# Altium PCB 风扇_V1.5.PcbDoc
Units mm, origin at the board's own origin, x right, y up, seen from the top; angles counter-clockwise.
Board outline 21 x 121 mm, 2 copper layers (Top Layer, Bottom Layer); 84 components, 72 nets, 310 pads, 155 vias.
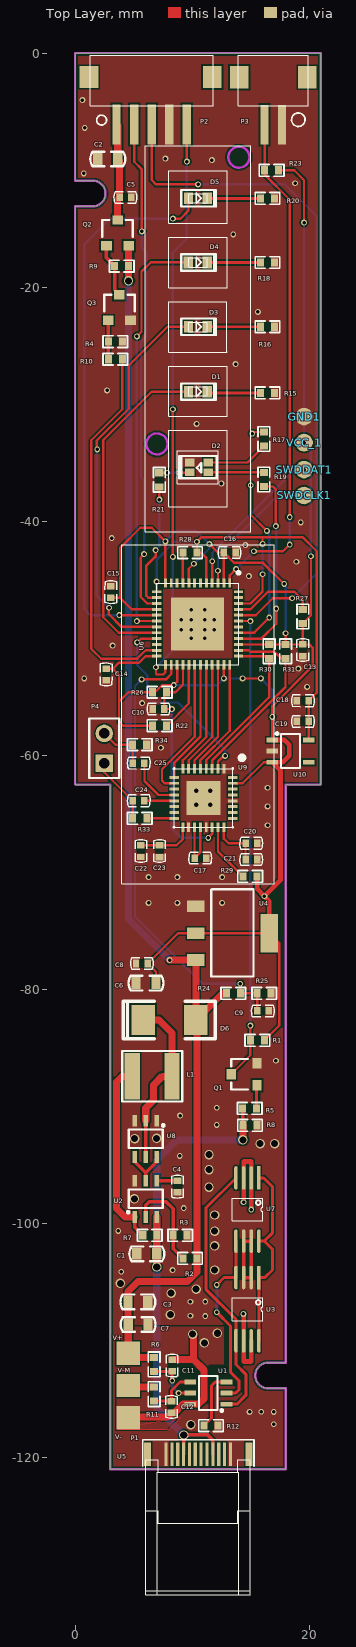
[diagram p0: Top Layer view]
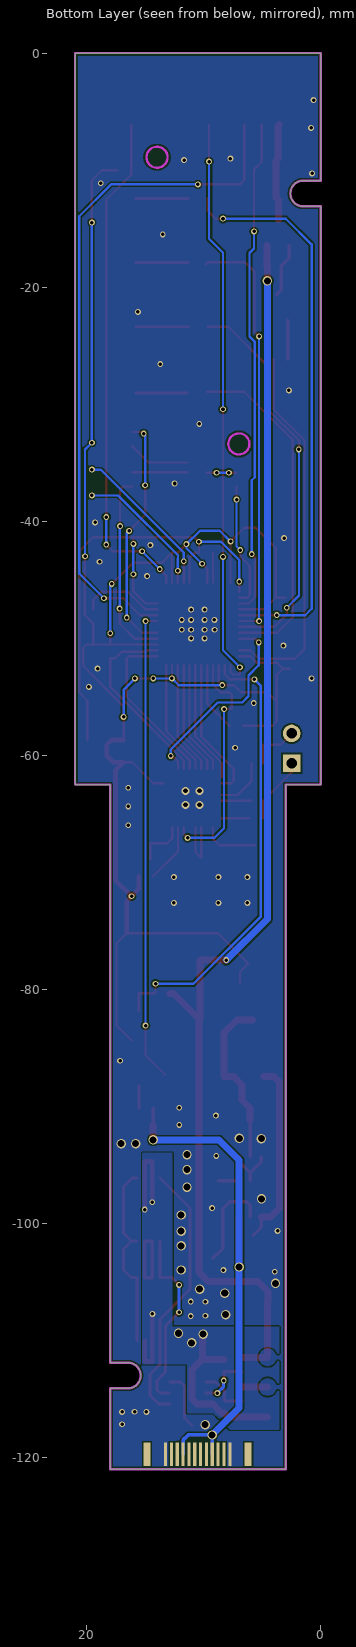
[diagram p1: Bottom Layer view, seen from below]

## Layer stack, top to bottom
Top Layer: signal copper 0.0356
Dielectric: dielectric 0.32, FR-4, Dk 4.8
Bottom Layer: signal copper 0.0356

## Board outline
0,-62.5 0,-13.1 1.5,-13.1 ccw(c1.5,-12) 1.5,-10.9 0,-10.9 0,0 21,0 21,-62.5 18,-62.5 18,-111.9 16.5,-111.9 ccw(c16.5,-113) 16.5,-114.1 18,-114.1 18,-121 3,-121 3,-62.5

## Design rules (kind name [scope] priority, off if disabled: settings)
Clearance [All] p1: gap=0.15
FabricationTestPointUsage TestPointUsage [All] p1: valid=0 allowmultiple=FALSE
FabricationTestpoint Testpoint [(IsPad And (OnTopLayer Or OnBottomLayer))] p1: side=3 testpointundercomponent=TRUE minsize=1.016 maxsize=2.54 preferedsize=1.524 minholesize=0 maxholesize=1.016 preferedholesize=0.813 testpointgrid=0.025 allowsidetop=TRUE allowsidebottom=TRUE usegrid=TRUE gridtolerance=0
PlaneConnect [All] p1: planeconnectstyle=Direct reliefexpansion=0.508 reliefentries=4 reliefconductorwidth=0.254 reliefairgap=0.254
PolygonConnect [All] p1: connectstyle=Direct reliefconductorwidth=0.254 reliefentries=4 polygonreliefangle="90 Angle"
RoutingVias [All] p1: holewidth=0.3 width=0.5 viastyle="Through Hole" minholewidth=0.3 minwidth=0.5 maxholewidth=0.711 maxwidth=1.27
SilkscreenOverComponentPads [All] p1: minsilkscreentomaskgap=0.254
SolderMaskExpansion [All] p1: expansion=0.102
Width [All] p1: maxlimit=1 minlimit=0.15 preferedwidth=0.254
24 further rules are at their usual default settings.

## Components (designator, comment, footprint, x,y, rotation, side; value= is the part's Value field where it differs from the comment)
C1 "47uF" C-0603 6.129,-102.598 r180 top
C2 "22uF" C-0603 2.797,-9.05 r0 top
C3 "47uF" C-0603 5.367,-106.713 r180 top
C4 "4.7uF" C-0402 8.748,-96.853 r270 top
C5 "1uF" C-0402 4.313,-12.334 r180 top
C6 "22uF" C-0603 6.06,-79.468 r0 top
C7 "22uF" C-0603 5.387,-108.646 r180 top
C8 "1uF" C-0402 5.707,-77.792 r0 top
C9 "1uF" C-0402 16.06,-81.849 r180 top
C10 "0.1uF" C-0402 7.119,-56.05 r0 top
C11 "1uF" C-0402 8.293,-112.141 r270 top
C12 "1uF" C-0402 8.242,-115.694 r90 top
C13 "1uF" C-0402 19.459,-51.031 r90 top
C14 "1uF" C-0402 2.659,-53.104 r90 top
C15 "1uF" C-0402 3.051,-46.048 r270 top
C16 "1uF" C-0402 13.216,-42.673 r180 top
C17 "4.7uF" C-0402 10.709,-68.786 r180 top
C18 "1uF" C-0402 19.456,-55.344 r0 top
C19 "10uF" C-0402 19.456,-57.108 r0 top
C20 "10uF" C-0402 15.07,-67.516 r180 top
C21 "0.1uF" C-0402 15.07,-68.908 r180 top
C22 "0.1uF" C-0402 5.629,-68.194 r90 top
C23 "10uF" C-0402 7.219,-68.199 r90 top
C24 "1uF" C-0402 5.428,-63.894 r0 top
C25 "1uF" C-0402 5.428,-60.678 r0 top
D1 "LED0" LED-0603 11.857,-29.611 r180 top
D2 "RGB-GND" 0603*2-LED 9.794,-35.834 r0 top
D3 "LED0" LED-0603 11.857,-24.066 r180 top
D4 "LED0" LED-0603 11.854,-18.567 r180 top
D5 "LED0" LED-0603 11.857,-13.084 r180 top
D6 "SS34" DSMD 10.328,-82.619 r180 top
GND1 "TP" TP-1.5 19.566,-31.062 r90 top
L1 "10uH" L-SMD 6.584,-87.417 r180 top
P1 "Header 3H" 3P-SMT-3*3 4.544,-111.115 r270 top
P2 "TU1501WNR-5PS-VOID-C0-NL-A" TU1501WNR-5PS-VOID-*-NL-A 1.3,-4.483 r0 top
P3 "TU1501WNR-2PS-VOID-C0-NL-A" TU1501WNR-2PS-VOID-*-NL-A 19.939,-4.501 r180 top
P4 "MIC" HDR1X2 2.494,-60.673 r90 top
Q1 "8050" SOT-23 13.343,-87.262 r90 top
Q2 "BM2301" SOT-23 3.635,-14.262 r0 top
Q3 "8050" SOT-23 3.787,-20.637 r0 top
R1 "10K" R-0402 15.448,-84.361 r0 top
R2 "60K" R-0402 9.954,-102.997 r180 top
R3 "10K" R-0402 8.857,-101.023 r0 top
R4 "10K" R-0402 3.564,-24.651 r180 top
R5 "1K" R-0402 14.793,-90.175 r0 top
R6 "330R" R-0402 6.756,-112.177 r90 top
R7 "60mR" R-0402 6.256,-101.021 r0 top
R8 "10K" R-0402 14.816,-91.62 r0 top
R9 "470K" R-0402 3.856,-18.199 r0 top
R10 "4.7K" R-0402 3.564,-26.162 r180 top
R11 "330R" R-0402 6.756,-114.717 r90 top
R12 "2K" R-0402 11.735,-117.279 r180 top
R15 "500R" R-0402 16.309,-29.042 r0 top
R16 "500R" R-0402 16.309,-23.386 r0 top
R17 "500R" R-0402 16.142,-32.855 r270 top
R18 "500R" R-0402 16.309,-17.897 r0 top
R19 "500R" R-0402 16.142,-36.558 r90 top
R20 "500R" R-0402 16.309,-12.418 r0 top
R21 "500R" R-0402 7.201,-36.589 r90 top
R22 "47K" R-0402 7.352,-57.473 r180 top
R23 "47K" R-0402 16.67,-10.02 r0 top
R24 "2M" R-0402 13.396,-80.343 r0 top
R25 "1M" R-0402 16.033,-80.343 r0 top
R26 "47K" R-0402 7.352,-54.615 r180 top
R27 "47K" R-0402 19.459,-48.011 r270 top
R28 "NC/0R" R-0402 9.942,-42.685 r180 top
R29 "47K" R-0402 15.083,-70.358 r180 top
R30 "4.7K" R-0402 16.581,-51.242 r90 top
R31 "4.7K" R-0402 17.988,-51.244 r90 top
R33 "2.2K" R-0402 5.4,-65.39 r0 top
R34 "2.2K" R-0402 5.397,-59.096 r0 top
SWDCLK1 "TP" TP-1.5 19.566,-37.803 r90 top
SWDDAT1 "TP" TP-1.5 19.566,-35.59 r90 top
U1 "HY2120-CB" SOT-23-6L 11.384,-114.498 r90 top
U2 "HM4033" SOT-23-6L 6.04,-97.902 r0 top
U3 "8205A" TSSOP8 15.7,-104.637 r270 top
U4 "AMS1117-3.3V" SOT-223 13.447,-75.204 r270 top
U5 "USB Type-C" "USB-type C" 10.523,-119.72 r0 top
U6 "SNC73280M4" QFN48-7*7 -0.033,-49.533 r270 top
U7 "8205A" TSSOP8 15.7,-96.118 r270 top
U8 "HM8205-6" SOT-23-6L 6.04,-92.776 r180 top
U9 "SNAUD01" QFN32_AUDO01 10.96,-63.642 r270 top
U10 "ACE50912BN+" SOT-23-5 18.405,-59.644 r270 top
VCC_1 "TP" TP-1.5 19.566,-33.292 r90 top

## Footprints (in the part's own frame and the unit in brackets; to place one, negate y for a bottom-side part, rotate by r counter-clockwise, add the part's x,y. Pads: shape width x height; smd on the part's side, far side on the other; paste and mask are expansions set on the pad)
3P-SMT-3*3 [mm]
  rect 2x2 smd: 1(0,0) 2(2.74,0) 3(5.48,0)
0603*2-LED [mm]
  rect 0.8x0.65 smd: 1(1.6,0.85) 2(1.6,0) 3(0,0) 4(0,0.85)
  silkscreen extent -0.9,-0.5 2.3,1.4
C-0402 [mm]
  rect 0.55x0.65 smd: 1(-0.5,0) 2(0.5,0)
  Top Layer pour cut-out: -0.228,0.419 -0.228,-0.419 0.229,-0.419 0.216,-0.406 0.216,0.419
  silkscreen extent -0.96,-0.5 0.99,0.5
C-0603 [mm]
  rect 0.8x1 smd: 1(-0.85,0) 2(0.85,0)
  silkscreen extent -1.49,-0.63 1.49,0.63
DSMD [mm]
  rect 2x2.54 smd: 1(0,0) 3(4.5,0)
  silkscreen extent -1.65,-1.6 6.22,1.6
HDR1X2 [mm] "Connector; Header; 2 Position"
  rect 1.5x1.5 hole 0.9: 1(0,0)
  round 1.5 hole 0.9: 2(2.54,0)
  silkscreen extent -1.27,-1.27 3.81,1.27
L-SMD [mm]
  rect 1.3x4 smd: 1(1.692,0.016) 2(-1.708,0.016)
  silkscreen extent -2.57,-2.14 2.56,2.17
LED-0603 [mm]
  rect 0.8x1 smd: 1(2.17,-0.68) 2(0.57,-0.68)
  silkscreen extent -0.19,-1.38 2.77,0.02
QFN32_AUDO01 [mm] "QFN, 32-Leads, Body 5.0x5.0mm (max), Pitch 0.50mm, IPC Medium Density"
  rect 0.8x0.25 smd: 1(-2.5,1.75) 2(-2.5,1.25) 3(-2.5,0.75) 4(-2.5,0.25) 5(-2.5,-0.25) 6(-2.5,-0.75) 7(-2.5,-1.25) 8(-2.5,-1.75) 17(2.5,-1.75) 18(2.5,-1.25) 19(2.5,-0.75) 20(2.5,-0.25) 21(2.5,0.25) 22(2.5,0.75) 23(2.5,1.25) 24(2.5,1.75)
  rect 0.25x0.8 smd: 9(-1.75,-2.5) 10(-1.25,-2.5) 11(-0.75,-2.5) 12(-0.25,-2.5) 13(0.25,-2.5) 14(0.75,-2.5) 15(1.25,-2.5) 16(1.75,-2.5) 25(1.75,2.5) 26(1.25,2.5) 27(0.75,2.5) 28(0.25,2.5) 29(-0.25,2.5) 30(-0.75,2.5) 31(-1.25,2.5) 32(-1.75,2.5)
  rect 2.9x2.9 smd: 33(0,0)
  silkscreen extent -3.67,-2.52 2.52,3.55
QFN48-7*7 [mm]
  rect 0.8x0.25 smd: 1(-4.25,13.25) 2(-4.25,12.75) 3(-4.25,12.25) 4(-4.25,11.75) 5(-4.25,11.25) 6(-4.25,10.75) 7(-4.25,10.25) 8(-4.25,9.75) 9(-4.25,9.25) 10(-4.25,8.75) 11(-4.25,8.25) 12(-4.25,7.75) 25(2.75,7.75) 26(2.75,8.25) 27(2.75,8.75) 28(2.75,9.25) 29(2.75,9.75) 30(2.75,10.25) 31(2.75,10.75) 32(2.75,11.25) 33(2.75,11.75) 34(2.75,12.25) 35(2.75,12.75) 36(2.75,13.25)
  rect 0.25x0.8 smd: 13(-3.5,7) 14(-3,7) 15(-2.5,7) 16(-2,7) 17(-1.5,7) 18(-1,7) 19(-0.5,7) 20(0,7) 21(0.5,7) 22(1,7) 23(1.5,7) 24(2,7) 37(2,14) 38(1.5,14) 39(1,14) 40(0.5,14) 41(0,14) 42(-0.5,14) 43(-1,14) 44(-1.5,14) 45(-2,14) 46(-2.5,14) 47(-3,14) 48(-3.5,14)
  rect 4.5x4.5 smd: 49(-0.75,10.5)
  silkscreen extent -5.25,7 2.75,14.13
R-0402 [mm]
  rect 0.6x0.7 smd: 1(-0.473,0) 2(0.727,0)
  Top Layer pour cut-out: -0.178,0.445 -0.178,-0.445 0.432,-0.445 0.432,0.445
  silkscreen extent -0.92,-0.5 1.18,0.5
SOT-23 [mm]
  rect 0.9x0.8 smd: 1(-0.95,-2.2) 2(0.95,-2.2) 3(0,0)
  silkscreen extent -1.3,-1.44 1.3,0
SOT-23-5 [mm]
  rect 0.4x1 smd: 1(-0.95,-1.55) 2(0,-1.55) 3(0.95,-1.55) 4(0.95,1.55) 5(-0.95,1.55)
  silkscreen extent -1.6,-1.24 1.45,0.8
SOT-23-6L [mm]
  rect 0.4x1 smd: 1(-0.95,-1.55) 2(0,-1.55) 3(0.95,-1.55) 4(0.95,1.55) 5(0,1.55) 6(-0.95,1.55)
  silkscreen extent -1.6,-1.24 1.45,0.8
SOT-223 [mm]
  rect 1x1.5 smd: 1(-2.3,-3.15) 2(0,-3.15) 3(2.3,-3.15)
  rect 3.3x1.5 smd: ""(0,3.15)
  silkscreen extent -3.76,-1.8 3.7,1.8
TP-1.5 [mm]
  round 1.5 smd: 1(0,0)
TSSOP8 [mm]
  rect 2x0.3 smd: 1(0,0)
  oval 2x0.3 smd: 2(0,-0.65) 3(0,-1.3) 4(0,-1.95) 5(5.4,-1.95) 6(5.4,-1.3) 7(5.4,-0.65) 8(5.4,0)
  silkscreen extent 1.74,-2.28 3.66,0.33
TU1501WNR-2PS-VOID-*-NL-A [mm]
  rect 0.7x3.4 smd: 1(2.25,1.62) 2(3.75,1.62)
  rect 1.6x1.9 smd: 3(0.11,-2.438) 4(5.9,-2.438)
  silkscreen extent 0,-4.32 6,1.77
TU1501WNR-5PS-VOID-*-NL-A [mm]
  rect 0.7x3.4 smd: 1(2.25,-1.62) 2(3.75,-1.62) 3(5.25,-1.62) 4(6.75,-1.62) 5(8.25,-1.62)
  rect 1.6x1.9 smd: 6(-0.11,2.438) 7(10.43,2.438)
  silkscreen extent 0,-1.66 10.5,4.3
"USB-type C" [mm]
  rect 0.27x2 smd: 1(-2.75,0) 2(-2.25,0) 3(-1.75,0) 4(-1.25,0) 5(-0.75,0) 6(-0.25,0) 7(0.25,0) 8(0.75,0) 9(1.25,0) 10(1.75,0) 11(2.25,0) 12(2.75,0)
  rect 0.27x2 smd far side: 13(2.75,0) 14(2.25,0) 15(1.75,0) 16(1.25,0) 17(0.75,0) 18(0.25,0) 19(-0.25,0) 20(-0.75,0) 21(-1.25,0) 22(-1.75,0) 23(-2.25,0) 24(-2.75,0)
  rect 0.6x2 smd: ""(-4.32,0) ""(4.32,0)
  rect 0.6x2 smd far side: ""(-4.32,0) ""(4.32,0)
  silkscreen extent -4.73,-1.03 4.76,1.22

## Part data
C1 C2 C3 C4 C5 C6 C7 C8 C9 C10 C11 C12 C13 C14 C15 C16 C17 C18 C19 C20 C21 C22 C23 C24 C25: library part Cap, "Capacitor"
D1 D3 D4 D5: "Typical INFRARED GaAs LED"
D6: library part "Diode 10TQ035", "Schottky Rectifier"
L1: library part Inductor, "Inductor"
P1: "Header, 3-Pin, Right Angle"
P4: library part "Header 2", "Header, 2-Pin"
Q1 Q3: library part NPN, "NPN Bipolar Transistor"
Q2: library part PMOS-2, "P-Channel Power MOSFET"
R1 R2 R3 R4 R5 R6 R7 R8 R9 R10 R11 R12 R15 R16 R17 R18 R19 R20 R21 R22 R23 R24 R25 R26 R27 R28 R29 R30 R31 R33 R34: library part Res1, "Resistor"
U1: library part HY2120
U4: library part AMS1117

## Via types
v1: diameter 0.5, hole 0.3, Top Layer to Bottom Layer, tented both sides, 127 vias
v2: diameter 0.8, hole 0.6, Top Layer to Bottom Layer, tented both sides, 24 vias
v3: diameter 0.7, hole 0.4, Top Layer to Bottom Layer, tented both sides, 4 vias

## Nets (pads, with @x,y where several pads share a name; then routed paths per layer and width w, separated by ;. In a path a pad name is that pad's centre, name@x,y a point inside that pad or via, vN(x,y) a via of type N, cw(c..) or ccw(c..) an arc to the next point about the centre after c; other vN are vias at no path point)
5V: C1.1 R5.1 R7.2 R8.1 U2.3 U5.4 U5.9 U5.16 U5.21 | length 50.7
  Top Layer w0.3: U5.4 U5.4@9.273,-119.707 ; U5.4@9.286,-119.707 v2(9.286,-118.08) 11.34,-118.08 11.773,-118.514 U5.9 ; R8.1@14.32,-91.597 R5.1
  Top Layer w0.6: v2(6.98,-103.73) U2.3@6.98,-99.462 ; v2(14.33,-92.87) R8.1@14.33,-91.608
  Bottom Layer w0.3: U5.21 v2@9.273,-118.093 ; v2(9.286,-118.08) 11.34,-118.08 11.773,-118.514 U5.16
  Bottom Layer w0.6: v2(9.286,-118.08) 6.98,-115.774 v2(6.98,-103.73) 6.98,-94.58 8.69,-92.87 v2(14.33,-92.87) v2@14.13,-92.87
BAT: C3.2 C7.2 D6.1 P1.1 Q2.2 R2.1 R6.2 R9.2 R24.1 U4.3 | length 109.3
  Top Layer w0.6: C3.2 4.517,-105.823 5.38,-104.96 9.62,-104.96 10.427,-104.153 R2.1 10.427,-82.718 D6.1 ; C7.2 C3.2@4.537,-106.733 ; C7.2@4.544,-108.653 4.544,-111.45 R6.2 ; v2(4.57,-19.46) R9.2@4.57,-18.212 ; R9.2 Q2.2@4.583,-16.464 ; v1(8.08,-77.51) 8.086,-77.504 U4.3 ; U4.3@10.328,-77.535 D6.1 ; R24.1 12.603,-80.343 D6.1
  Bottom Layer w0.6: v2(4.57,-19.46) 4.57,-74 v1(8.08,-77.51)
BAT-: C11.1 C12.1 P1.3 U1.6 U3.6 U3.7 U7.2 U7.3 | length 30.8
  Top Layer w0.4: v1@14.4,-107.75 U3.6 14.4,-111.81 15.05,-111.81 U3.7 15.05,-111.3 ; v1(14.4,-98.19) U7.3 14.4,-94.71 15.05,-94.71 U7.2 v1(15.05,-98.82)
  Top Layer w0.6: P1.3@4.544,-116.53 7.906,-116.53 C12.1 8.479,-116.194 9.225,-115.448 U1.6 10.562,-115.448 11,-115.01 11,-112.51 10.131,-111.641 C11.1 ; 10.11,-111.68 v2@10.11,-109.49
  other v1: 14.39,-107.74
  other v2: 11.04,-110.21 10.05,-109.46 12.16,-109.39
BAT_ADC: C9.2 R24.2 R25.1 U6.26 | length 39.1
  Top Layer w0.2: v1(5.68,-53.52) 7.76,-53.52 8.218,-53.062 U6.26 ; v1(14.12,-79.53) 14.123,-79.533 R24.2 R25.1 C9.2
  Bottom Layer w0.2: v1(5.68,-53.52) 5.12,-54.08 5.12,-73.772 10.878,-79.53 v1(14.12,-79.53)
BIAS: R33.2 U9.16 | length 2.3
  Top Layer w0.2: R33.2 U9.16@8.458,-65.39
D6_1: D6.3 L1.2 U8.2 U8.5 | length 14.9
  Top Layer w0.3: U8.5 U8.2
  Top Layer w0.6: D6.3 7.179,-82.619 8.292,-83.732 L1.2 7.453,-87.433 6.72,-88.165 6.72,-89.47 6.04,-90.15 U8.2
DRV: U2.5 U8.4 U8.6 | length 4.2
  Top Layer w0.3: U8.4 5.09,-94.72 6.04,-95.67 ; U2.5 6.04,-95.67 ; U8.6 6.99,-94.72 6.04,-95.67
FB: R2.2 R3.1 U2.2 | length 8.3
  Top Layer w0.3: U2.2 6.04,-98.45 6.35,-98.14 7.77,-98.14 8.384,-98.754 8.384,-102.154 R2.2
GND: C1.2 C2.1 C3.1 C4.2 C5.1 C6.1 C7.1 C8.1 C9.1 C10.1 C13.1 C14.1 C15.1 C16.1 C17.1 C18.1 C19.1 C20.1 C21.1 C22.1 C23.1 D2.4 GND1.1 P2.4 P3.1 Q1.2 Q3.2 R3.2 R4.1 R8.2 R12.1 R15.2 R16.2 R18.2 R20.2 R25.2 R34.2 U2.6 U3.2 U3.3 U4.1 U5.1 U5.12 U5.13 U5.24 U6.49 U7.6 U7.7 U8.1 U8.3 U9.1 U9.18 U9.21 U9.28 U9.33 U10.2 | length 7.5
  Top Layer w0.3: U3.3 U7.6 U7.7 15.05,-103.09 U3.2 U3.3
  other v1: 16.98,-117.17 14.91,-116.11 15.91,-116.1 16.98,-116.11 11.12,-107.92 9.86,-107.89 9.86,-106.7 11.12,-106.69 3.94,-104.14 8.33,-104 3.69,-100.65 9.29,-98.7 8.94,-94.24 12.1,-91.59 8.97,-90.79 12.1,-90.12 17.16,-86.1 6.28,-72.62 8.75,-72.62 12.56,-72.62 6.28,-70.41 8.75,-70.41 12.56,-70.41 16.45,-65.98 16.45,-64.37 16.45,-62.78 7.33,-59.36 5.73,-55.55 19.82,-54.16 0.79,-53.44 19.08,-52.6 3.2,-50.63 9.94,-50.02 11.08,-50.02 9.08,-49.28 9.94,-49.28 11.08,-49.28 11.88,-49.28 9.09,-48.43 9.94,-48.43 11.08,-48.43 11.88,-48.43 9.94,-47.56 11.08,-47.55 14.85,-44.69 18.91,-43.46 14.56,-42.04 3.14,-41.44 19.29,-40.1 12.5,-36.78 10.39,-31.69 2.73,-28.83 13.72,-26.58 15.63,-22.12 13.51,-15.49 18.8,-11.12 0.74,-10.28 11.69,-9.14 7.72,-9.02 0.83,-6.4 0.62,-4.02
  other v2: 9.89,-117.2 8.14,-107.8 8.21,-105.96 10.35,-105.62 3.87,-105.12 11.93,-103.99 11.93,-101.92 11.93,-100.67 11.93,-99.29 5.07,-97.91 11.44,-96.91 11.44,-95.41 11.44,-94.13 15.82,-93.19 17.06,-93.19 5.09,-92.76 6.97,-92.74
  other v3: 10.36,-64.242 11.56,-64.242 10.36,-63.042 11.56,-63.042
IP-: C2.2 C5.2 P2.1 Q2.3 | length 8.3
  Top Layer w0.6: P2.1 3.647,-6.199 C2.2 3.812,-9.216 C5.2 3.635,-12.512 Q2.3
KEY_TOP: P3.2 R23.1 U6.1 | length 43.6
  Top Layer w0.2: U6.1@13.218,-45.283 13.218,-44.632 v1(13.76,-44.09) ; v1(15.28,-42.57) 17.77,-42.57 v1(18.34,-42) ; P3.2 16.197,-6.129 R23.1 16.197,-10.387 18.34,-12.53 v1(18.34,-39.65)
  Bottom Layer w0.2: v1(13.76,-44.09) v1(15.28,-42.57) ; v1(18.34,-42) v1(18.34,-39.65)
LED1: D1.1 U6.20 | length 29.3
  Top Layer w0.2: U6.20@6.968,-49.533 3.733,-49.533 2.4,-48.2 2.4,-33.07 6.539,-28.931 D1.1 D1.1@9.711,-28.931
LED2: D3.1 U6.19 | length 33.8
  Top Layer w0.2: v1(1.89,-33.86) 1.857,-33.827 1.857,-33.117 4.587,-30.388 4.587,-26.703 7.904,-23.386 D3.1 ; v1(2.91,-47.4) 2.89,-47.42 2.89,-47.95 3.973,-49.033 U6.19@6.968,-49.033
  Bottom Layer w0.2: v1(1.89,-33.86) 1.86,-33.89 1.86,-46.35 v1(2.91,-47.4)
LED3: D4.1 U6.18 | length 36.3
  Top Layer w0.2: v1(5.283,-48.533) U6.18@6.968,-48.533 ; v1(5.283,-24.207) 5.68,-23.81 5.68,-18.67 6.463,-17.887 D4.1 D4.1@9.86,-18.063
  Bottom Layer w0.2: v1(5.283,-48.533) v1(5.283,-24.207)
LED4: D5.1 U6.17 | length 48.7
  Top Layer w0.2: v1(3.77,-48.03) 3.773,-48.033 U6.17@6.968,-48.033 ; v1(8.36,-14.15) 9,-14.15 9.687,-13.463 D5.1
  Bottom Layer w0.2: v1(3.77,-48.03) 1.33,-48.03 0.79,-47.49 0.79,-16.35 2.99,-14.15 v1(8.36,-14.15)
LED_B: R17.1 U6.41 | length 20.5
  Top Layer w0.2: U6.41@13.968,-49.533 15.297,-49.533 v1(16.59,-48.24) ; v1(15.01,-36.93) 15.01,-39.45 v1(16.39,-40.83) ; v1@15.273,-32.382 R17.1
  Bottom Layer w0.2: v1(15.01,-36.93) 15.01,-32.644 v1(15.137,-32.517) ; v1(16.39,-40.83) 16.59,-41.03 v1(16.59,-48.24)
LED_G: R19.1 U6.40 | length 16.4
  Top Layer w0.2: U6.40@13.968,-50.033 15.927,-50.033 17.19,-48.77 v1(17.19,-47.47) ; R19.1@16.16,-37.05 R19.1 16.901,-37.031 17.16,-37.29 v1(17.16,-40.42)
  Bottom Layer w0.2: v1(17.16,-40.42) 17.19,-40.45 v1(17.19,-47.47)
LED_R: R21.1 U6.14 | length 10.7
  Top Layer w0.2: v1(6.88,-42.47) 6.88,-43.03 6.07,-43.84 6.07,-46.35 6.253,-46.533 U6.14@6.968,-46.533 ; v1(7.2,-38.15) R21.1@7.2,-37.063
  Bottom Layer w0.2: v1(6.88,-42.47) 7.2,-42.15 v1(7.2,-38.15)
M_CW: P2.3 U6.44 | length 58.8
  Top Layer w0.2: P2.3 6.55,-10.85 6.92,-11.22 v1(10.51,-11.22) ; U6.44@13.968,-48.033 15.447,-48.033 16.89,-46.59 v1(18.54,-46.59)
  Bottom Layer w0.2: v1(10.51,-11.22) 17.92,-11.22 20.65,-13.95 20.65,-44.48 v1(18.54,-46.59)
M_FG: P2.2 U6.15 | length 42.8
  Top Layer w0.2: P2.2 5.05,-9.28 5.71,-9.94 v1(5.71,-15.24) ; v1(5.9,-42.81) 5.61,-43.1 5.61,-46.476 6.167,-47.033 U6.15@6.968,-47.033
  Bottom Layer w0.2: v1(5.71,-15.24) 5.71,-16.69 6.1,-17.08 6.1,-24.23 5.633,-24.697 5.633,-36.243 5.9,-36.51 v1(5.9,-42.81)
M_GND: P1.2 R11.2 | length 2.2
  Top Layer w0.6: P1.2@4.544,-113.99 R11.2@6.756,-113.99
M_PWM: P2.5 U6.25 | length 49.6
  Top Layer w0.2: v1(6.91,-52.48) 6.91,-53.02 6.99,-53.1 7.52,-53.1 7.718,-52.902 U6.25 ; v1(8.36,-43.05) v1(8.36,-30.44) ; v1(9.55,-9.27) P2.5
  Bottom Layer w0.2: v1(6.91,-52.48) 8.36,-51.03 v1(8.36,-43.05) ; v1(8.36,-30.44) 8.36,-17.06 9.55,-15.87 v1(9.55,-9.27)
MCLK: U6.21 U9.2 | length 17.3
  Top Layer w0.2: v1(5.3,-50.36) 5.627,-50.033 U6.21@6.968,-50.033 ; U9.2 12.21,-60.53 12.68,-60.06 v1(12.82,-60.06)
  Bottom Layer w0.2: v1(5.3,-50.36) 5.3,-52.3 6.18,-53.18 6.18,-54.95 6.72,-55.49 8.8,-55.49 12.82,-59.51 v1(12.82,-60.06)
MICN_L: C25.2 U9.12 | length 4.5
  Top Layer w0.2: C25.2 5.928,-62.198 7.122,-63.392 U9.12
MICN_R: U9.15
MICP_L: C24.2 U9.13 | length 2.5
  Top Layer w0.2: C24.2 U9.13@8.459,-63.894
MICP_R: U9.14
NetC4_1: C4.1 U2.4 | length 1.8
  Top Layer w0.3: U2.4 C4.1@8.746,-96.352
NetC11_2: C11.2 R6.1 U1.5 | length 4.6
  Top Layer w0.254: R6.1 8.284,-112.65 8.284,-113.414 v1(8.3,-113.43) ; v1(8.842,-114.498) U1.5
  Bottom Layer w0.254: v1(8.3,-113.43) 8.3,-113.956 v1(8.842,-114.498)
NetC12_2: C12.2 R11.1 U1.4 | length 4.3
  Top Layer w0.254: R11.1 8.238,-115.19 8.238,-114.272 8.962,-113.548 U1.4
NetC17_2: C17.2 U9.19 U9.20 | length 5.5
  Top Layer w0.2: 10.208,-67.869 C17.2 10.71,-68.284 U9.20 ; 10.211,-67.866 U9.19@10.211,-66.143
NetC24_1: C24.1 P4.1 R33.1 | length 5.7
  Top Layer w0.2: P4.1 2.494,-61.46 C24.1 4.927,-63.895 R33.1
NetC25_1: C25.1 P4.2 R34.1 | length 4.4
  Top Layer w0.2: P4.2 3.457,-59.096 R34.1 4.928,-59.1 C25.1
NetD1_2: D1.2 R15.1 | length 4.4
  Top Layer w0.254: D1.2@11.398,-29.042 R15.1
NetD2_1: D2.1 R17.2 | length 5.3
  Top Layer w0.2: D2.1 14.739,-34.984 R17.2
NetD2_2: D2.2 R19.2 | length 4.7
  Top Layer w0.2: D2.2 11.397,-35.831 R19.2
NetD2_3: D2.3 R21.2 | length 2.6
  Top Layer w0.2: R21.2 7.858,-35.862 v1(7.86,-35.86) ; v1(8.91,-35.86) D2.3@9.769,-35.86
  Bottom Layer w0.2: v1(7.86,-35.86) v1(8.91,-35.86)
NetD3_2: D3.2 R16.1 | length 4.5
  Top Layer w0.2: D3.2 R16.1
NetD4_2: D4.2 R18.1 | length 4.5
  Top Layer w0.254: D4.2@11.294,-17.897 R18.1
NetD5_2: D5.2 R20.1 | length 4.5
  Top Layer w0.254: D5.2@11.301,-12.418 R20.1
NetL1_1: L1.1 R7.1 U2.1 | length 16
  Top Layer w0.3: U2.1 5.09,-100.328 R7.1
  Top Layer w0.6: L1.1 4.05,-87.433 3.55,-87.933 3.55,-98.724 4.278,-99.452 U2.1
NetQ1_1: Q1.1 R5.2 | length 1.9
  Top Layer w0.254: R5.2 Q1.1@15.52,-88.234
NetQ2_1: Q2.1 Q3.3 R9.1 | length 4.6
  Top Layer w0.3: Q2.1 2.685,-17.501 R9.1 3.383,-20.233 Q3.3
NetQ3_1: Q3.1 R4.2 R10.2 | length 3.3
  Top Layer w0.3: R10.2 Q3.1
NetR12_2: R12.2 U1.3 | length 5.1
  Top Layer w0.254: R12.2 11.65,-116.637 11.65,-113.88 11.982,-113.548 U1.3
NetR27_1: R27.1 U6.45 | length 7.2
  Top Layer w0.2: U6.45@13.968,-47.533 14.987,-47.533 16.49,-46.03 18.75,-46.03 19.459,-46.739 R27.1
NetU3_1: U3.1 U3.8 U7.1 U7.8 | length 16.5
  Top Layer w0.254: U3.8 U3.1 16.213,-104.637 16.86,-103.99 16.86,-102.21 16.168,-101.518 ; U7.8 16.168,-101.518 ; U7.1 16.118,-96.118 16.85,-96.85 16.85,-100.835 16.168,-101.518
OC: U1.2 U3.4 U7.5 | length 15.9
  Top Layer w0.254: v1(12.11,-107.6) 13.29,-108.78 13.29,-112.72 13.99,-113.42 13.99,-114.23 13.722,-114.498 U1.2 ; v1(12.11,-105.26) 12.733,-104.637 U3.4 U7.5
  Bottom Layer w0.254: v1(12.11,-107.6) v1(12.11,-105.26)
OD: U1.1 U3.5 U7.4 | length 23
  Top Layer w0.254: U1.1 13.832,-115.448 14.59,-114.69 14.59,-112.9 13.75,-112.06 U3.5 13.75,-108.2 11.173,-105.623 11.173,-98.695 U7.4
P4_6: SWDCLK1.1 U6.3 | length 11.9
  Top Layer w0.2: v1(12.21,-44.23) 12.218,-44.238 U6.3@12.218,-45.283
  Bottom Layer w0.2: v1@12.22,-44.23 v1(12.21,-44.23) 12.218,-44.222 12.218,-43.207 12.21,-43.198 12.21,-42.913 17.32,-37.803 v1(19.566,-37.803)
P4_7: SWDDAT1.1 U6.4 | length 13.4
  Top Layer w0.2: U6.4 11.71,-45.275 11.71,-43.43 v1(11.718,-43.422)
  Bottom Layer w0.2: v1(11.718,-43.422) 11.718,-42.672 18.8,-35.59 v1(19.566,-35.59)
PLL_OUT: U9.11
RST: C10.2 R26.1 U6.28 U9.22 | length 20.2
  Top Layer w0.2: v1(8.27,-56.05) C10.2 7.619,-54.821 7.83,-54.611 8.571,-54.611 9.218,-53.964 U6.28@9.218,-52.283 ; v1(11.38,-67.06) 11.71,-66.73 U9.22
  Bottom Layer w0.2: v1(8.27,-56.05) 8.27,-66.23 9.1,-67.06 v1(11.38,-67.06)
S_P4_8: R31.1 U6.38 U9.3 | length 16.4
  Top Layer w0.2: U9.3 11.71,-60.45 17.98,-54.18 R31.1@17.98,-51.726 ; U6.38 14.843,-51.033 14.975,-51.165 17.035,-51.165 17.587,-51.717 R31.1 ; U6.38@13.968,-51.033 U6.38@14,-51.065
S_P4_9: R30.1 U6.37 U9.4 | length 14.3
  Top Layer w0.2: U9.4 11.21,-60.41 16.581,-55.039 R30.1 16.399,-51.533 U6.37
S_P4_10: U6.36 U9.5 | length 9.9
  Top Layer w0.2: U9.5 10.71,-60.415 13.218,-57.907 U6.36@13.218,-52.283
S_P4_11: U6.34 U9.6 | length 9.7
  Top Layer w0.2: U9.6 10.21,-60.42 12.218,-58.412 U6.34@12.218,-52.283
S_P4_12: U6.33 U9.7 | length 9.7
  Top Layer w0.2: U9.7 9.71,-60.425 11.718,-58.417 U6.33
S_P4_13: U6.32 U9.8 | length 9.7
  Top Layer w0.2: U9.8 9.21,-60.43 11.218,-58.422 U6.32
S_P4_14: U6.31 U9.9 | length 10.5
  Top Layer w0.2: U9.9 8.46,-60.66 10.718,-58.402 U6.31
S_P4_15: U6.30 U9.10 | length 12.2
  Top Layer w0.2: U9.10 7.652,-62.392 7.43,-62.17 7.43,-61.195 10.218,-58.407 U6.30
SPK_N: U9.30
SPK_P: U9.29
SPK_VREF: C20.2 C21.2 U9.24 | length 4.4
  Top Layer w0.2: U9.24 12.71,-67.122 13.104,-67.516 C20.2 C21.2
USB_CHECK: Q1.3 R1.1 U6.43 | length 40.4
  Top Layer w0.2: Q1.3 14.975,-85.629 R1.1 v1@14.975,-83.105 ; U6.43 14.973,-48.533 v1(14.98,-48.54)
  Bottom Layer w0.2: v1@14.975,-83.095 v1(14.98,-83.1) v1(14.98,-48.54)
V_MOTOR: R10.1 U6.23 | length 32.1
  Top Layer w0.2: R10.1 4.037,-30.443 1.39,-33.09 1.39,-50.91 2.24,-51.76 5.3,-51.76 6.027,-51.033 U6.23@6.968,-51.033
VCC_33V: C6.2 C8.2 C13.2 C14.2 C15.2 C16.2 R1.2 R22.2 R23.2 R26.2 R27.2 R29.1 R30.2 R31.2 U4. U4.2 U6.2 U6.8 U6.12 U6.16 U6.24 U6.27 U6.35 U6.39 U9.31 U10.1 U10.3 VCC_1.1 | length 181.6
  Top Layer w0.2: C14.2 3.229,-52.603 ; C15.2 3.848,-46.548 ; R22.2 4.117,-57.473 3.76,-57.117 3.76,-55.41 ; C6.2 6.91,-78.494 C8.2 8.795,-75.204 U4.2 U4. 17.46,-76.068 17.46,-83.076 R1.2 ; U6.24 6.022,-51.533 5.445,-52.11 3.723,-52.11 3.229,-52.603 ; U6.16@6.968,-47.533 4.833,-47.533 3.848,-46.548 ; U6.12 v1(7.718,-41.732) 6.546,-40.56 5.57,-40.56 3.848,-42.282 3.848,-46.548 ; U6.27@8.718,-52.283 8.718,-53.712 8.415,-54.015 7.422,-54.015 6.822,-54.615 R26.2 4.555,-54.615 3.76,-55.41 ; U6.8@9.765,-45.237 9.718,-45.283 9.718,-44.072 v1(10.15,-43.64) ; v1(11.48,-41.96) 12.193,-42.673 C16.2 ; U6.2@12.715,-45.28 C16.2 ; v1(12.718,-53.438) U6.35@12.718,-52.283 ; U9.31 14.318,-62.392 16.116,-60.594 U10.3 ; U6.39@13.968,-50.533 C13.2@19.457,-50.533 ; v1(14.318,-53.438) 15.878,-53.438 v1(15.88,-53.44) ; U10.1 16.855,-55.825 20.3,-52.38 20.3,-50.81 20.023,-50.533 C13.2@19.457,-50.533 ; R23.2 18.722,-10.02 19.566,-10.864 v1(19.566,-14.486) ; v1(17.87,-45.36) 16.07,-43.56 13.602,-43.56 C16.2 ; R31.2 v1(17.988,-49.582) ; v1(20.15,-42.99) 20.16,-43 20.16,-48.037 R27.2 C13.2 C13.2@19.457,-50.533 ; 3.229,-52.603 3.76,-53.134 3.76,-55.41
  Top Layer w0.4: R29.1 15.556,-71.426 v1(16.175,-72.045) ; U4. 16.597,-72.467 v1(16.175,-72.045) ; U10.1 17.876,-58.694 18.29,-59.109 18.29,-60.06 17.756,-60.594 U10.3 17.55,-61.289 17.55,-70.671 v1(16.175,-72.045)
  Bottom Layer w0.2: v1(7.718,-41.732) 8.64,-40.81 10.33,-40.81 v1(11.48,-41.96) 11.48,-42.31 v1(10.15,-43.64) ; v1(8.43,-54) 8.445,-54.015 12.141,-54.015 v1(12.718,-53.438) v1(14.318,-53.438) ; v1(15.88,-53.44) 16.855,-54.415 v1(16.855,-56.72) ; v1(17.87,-45.36) 17.988,-45.478 v1(17.988,-49.582) ; v1(19.566,-14.486) v1(19.566,-33.292) 20.15,-33.876 v1(20.15,-42.99)
VDDL_11V: C18.2 C19.2 R28.1 U6.5 U6.13 U6.46 U10.5 | length 45.3
  Top Layer w0.2: U6.13@6.968,-46.033 6.968,-45.162 v1(6.97,-45.16) ; U6.5 11.218,-43.138 10.765,-42.685 R28.1 v1(10.415,-41.755) 10.81,-41.36 19.44,-41.36 20.65,-42.57 20.65,-54.651 C18.2 ; U6.46 14.992,-47.033 16.02,-46.005 v1(16.02,-44.53) ; v1(16.02,-41.94) 16.02,-41.37 ; U10.5 C18.2@19.955,-55.346
  Bottom Layer w0.2: v1(6.97,-45.16) 6.97,-43.31 8.525,-41.755 v1(10.415,-41.755) ; v1(16.02,-44.53) v1(16.02,-41.94)
VMID: C22.2 C23.2 U9.17 | length 4.8
  Top Layer w0.2: C22.2 8.667,-67.693 9.21,-67.15 U9.17
VO_11V: R28.2 U6.9 | length 2.6
  Top Layer w0.2: U6.9@9.215,-45.28 R28.2
WKP: R29.2 U9.23 | length 5.1
  Top Layer w0.2: U9.23 12.21,-68.213 R29.2
WKPN: R22.1 U6.29 | length 6
  Top Layer w0.2: R22.1 9.718,-55.581 U6.29@9.718,-52.283
pads on no net: P2.6 P2.7 P3.3 P3.4 U5. U5.2 U5.3 U5.5 U5.6 U5.7 U5.8 U5.10 U5.11 U5.14 U5.15 U5.17 U5.18 U5.19 U5.20 U5.22 U5.23 U6.6 U6.7 U6.10 U6.11 U6.22 U6.42 U6.47 U6.48 U9.25 U9.26 U9.27 U9.32 U10.4

## Polygon pours and split planes (outlines as drawn)
GND on Top Layer "Top Layer-No Net" (solid, remove dead copper): 0,0 21,0 21,-62.5 18,-62.5 18,-121 3,-121 3,-62.5 0,-62.5 0,0
BAT- on Top Layer "Top Layer-No Net" (solid, remove dead copper, pour order 1000): 3.55,-108.872 3.559,-108.863 3.559,-108.849 3.573,-108.849 3.582,-108.84 12.7,-108.84 12.7,-112.02 11.42,-112.02 11.42,-116.178 11.388,-116.21 11.378,-116.22 9.17,-116.22 8.686,-116.704 7.77,-117.62 7.738,-117.62 3.582,-117.62 3.55,-117.588 3.559,-117.578 3.559,-108.849
BAT- on Top Layer "Bottom Layer-No Net" (solid, remove dead copper, pour order 1000): 3.59,-117.61 8,-117.61 9.02,-116.59
GND on Bottom Layer "Top Layer-No Net" (solid, remove dead copper): 0,0 21,0 21,-62.5 18,-62.5 18,-121 3,-121 3,-62.5 0,-62.5 0,0
BAT- on Bottom Layer "Bottom Layer-No Net" (solid, remove dead copper, pour order 1002): 12.7,-93.98 15.24,-93.98 15.24,-112.02 11.55,-112.02 11.45,-112.02 11.42,-112.02 11.42,-116.21 9.17,-116.21 9.17,-116.22 8.14,-117.25 7.77,-117.62 3.55,-117.62 3.55,-108.84 12.7,-108.84 12.7,-93.98

## Keep-outs
Keep-Out Layer:
  circle w0.2: c7,-33.4 r0.9
  circle w0.2: c14,-8.9 r0.9
  lines w0.2: 0,-62.5 3,-62.5 3,-121 18,-121 18,-114.1 16.5,-114.1 cw(c16.5,-113) 16.5,-111.9 18,-111.9 18,-62.5 21,-62.5 21,0 0,0 0,-10.9 1.5,-10.9 cw(c1.5,-12) 1.5,-13.1 0,-13.1 0,-62.5

## Silkscreen, mask and mechanical layers (free items; w line width, h text height)
Top Overlay:
  lines w0.05: 6.03,-131.38 14.97,-131.38 ; 6.03,-124.57 7.1,-124.57 7.1,-125.62 ; 7.03,-131.75 7.03,-121.25 13.97,-121.25 13.97,-131.75 ; 7.03,-125.62 13.97,-125.62 ; 7.1,-121.25 7.1,-120.2 6.03,-120.2 6.03,-131.75 14.97,-131.75 14.97,-120.2 ; 13.9,-125.62 13.9,-124.57 14.97,-124.57 ; 13.9,-121.25 13.9,-120.2 14.97,-120.2 ; 8.75,-36.8 12.25,-36.8 12.25,-34 8.75,-34 8.75,-36.8 ; 9.7,-29.3 11.3,-29.3 11.3,-28.5 9.7,-28.5 9.7,-29.3 ; 9.7,-23.8 11.3,-23.8 11.3,-23 9.7,-23 9.7,-23.8 ; 9.7,-18.3 11.3,-18.3 11.3,-17.5 9.7,-17.5 9.7,-18.3 ; 9.7,-12.8 11.3,-12.8 11.3,-12 9.7,-12 9.7,-12.8
  lines w0.1: 12.96,-25.54 12.97,-25.55 ; 12.96,-21.25 8,-21.25 8,-25.55 12.97,-25.55 ; 12.97,-21.26 12.97,-25.55 ; 4,-71 4,-42 17,-42 17,-71 4,-71 ; 6,-40.9 6,-7.9 15,-7.9 15,-40.9 6,-40.9 ; 8,-38.75 8,-32.25 13,-32.25 13,-38.75 8,-38.75 ; 8,-31.05 8,-26.75 13,-26.75 13,-31.05 8,-31.05 ; 8,-20.05 8,-15.75 13,-15.75 13,-20.05 8,-20.05 ; 8,-14.55 8,-10.05 13,-10.05 13,-14.55 8,-14.55
  text "V+" at 3.23,-109.97 h0.4
  text "V-M" at 3.66,-112.77 h0.4
  text "V-" at 3.45,-118.43 h0.4
Mechanical 2:
  lines w0.05: 3,-5.75 3,-0.25 9.6,-0.25 9.6,-5.75 3,-5.75 ; 11.4,-5.75 18,-5.75 18,-0.25 11.4,-0.25 11.4,-5.75

## Dimensions
0,0 to 3,-121 on Keep-Out Layer
0,0 to 21,0 on Keep-Out Layer